# Altium PCB plp_com_u2.PcbDoc
Units mm, origin at the board's own origin, x right, y up, seen from the top; angles counter-clockwise.
Board outline 44.5 x 44.5 mm, 2 copper layers (Top Layer, Bottom Layer), stack 1.486 mm thick; 1 components, 0 nets, 6 pads, 0 vias.
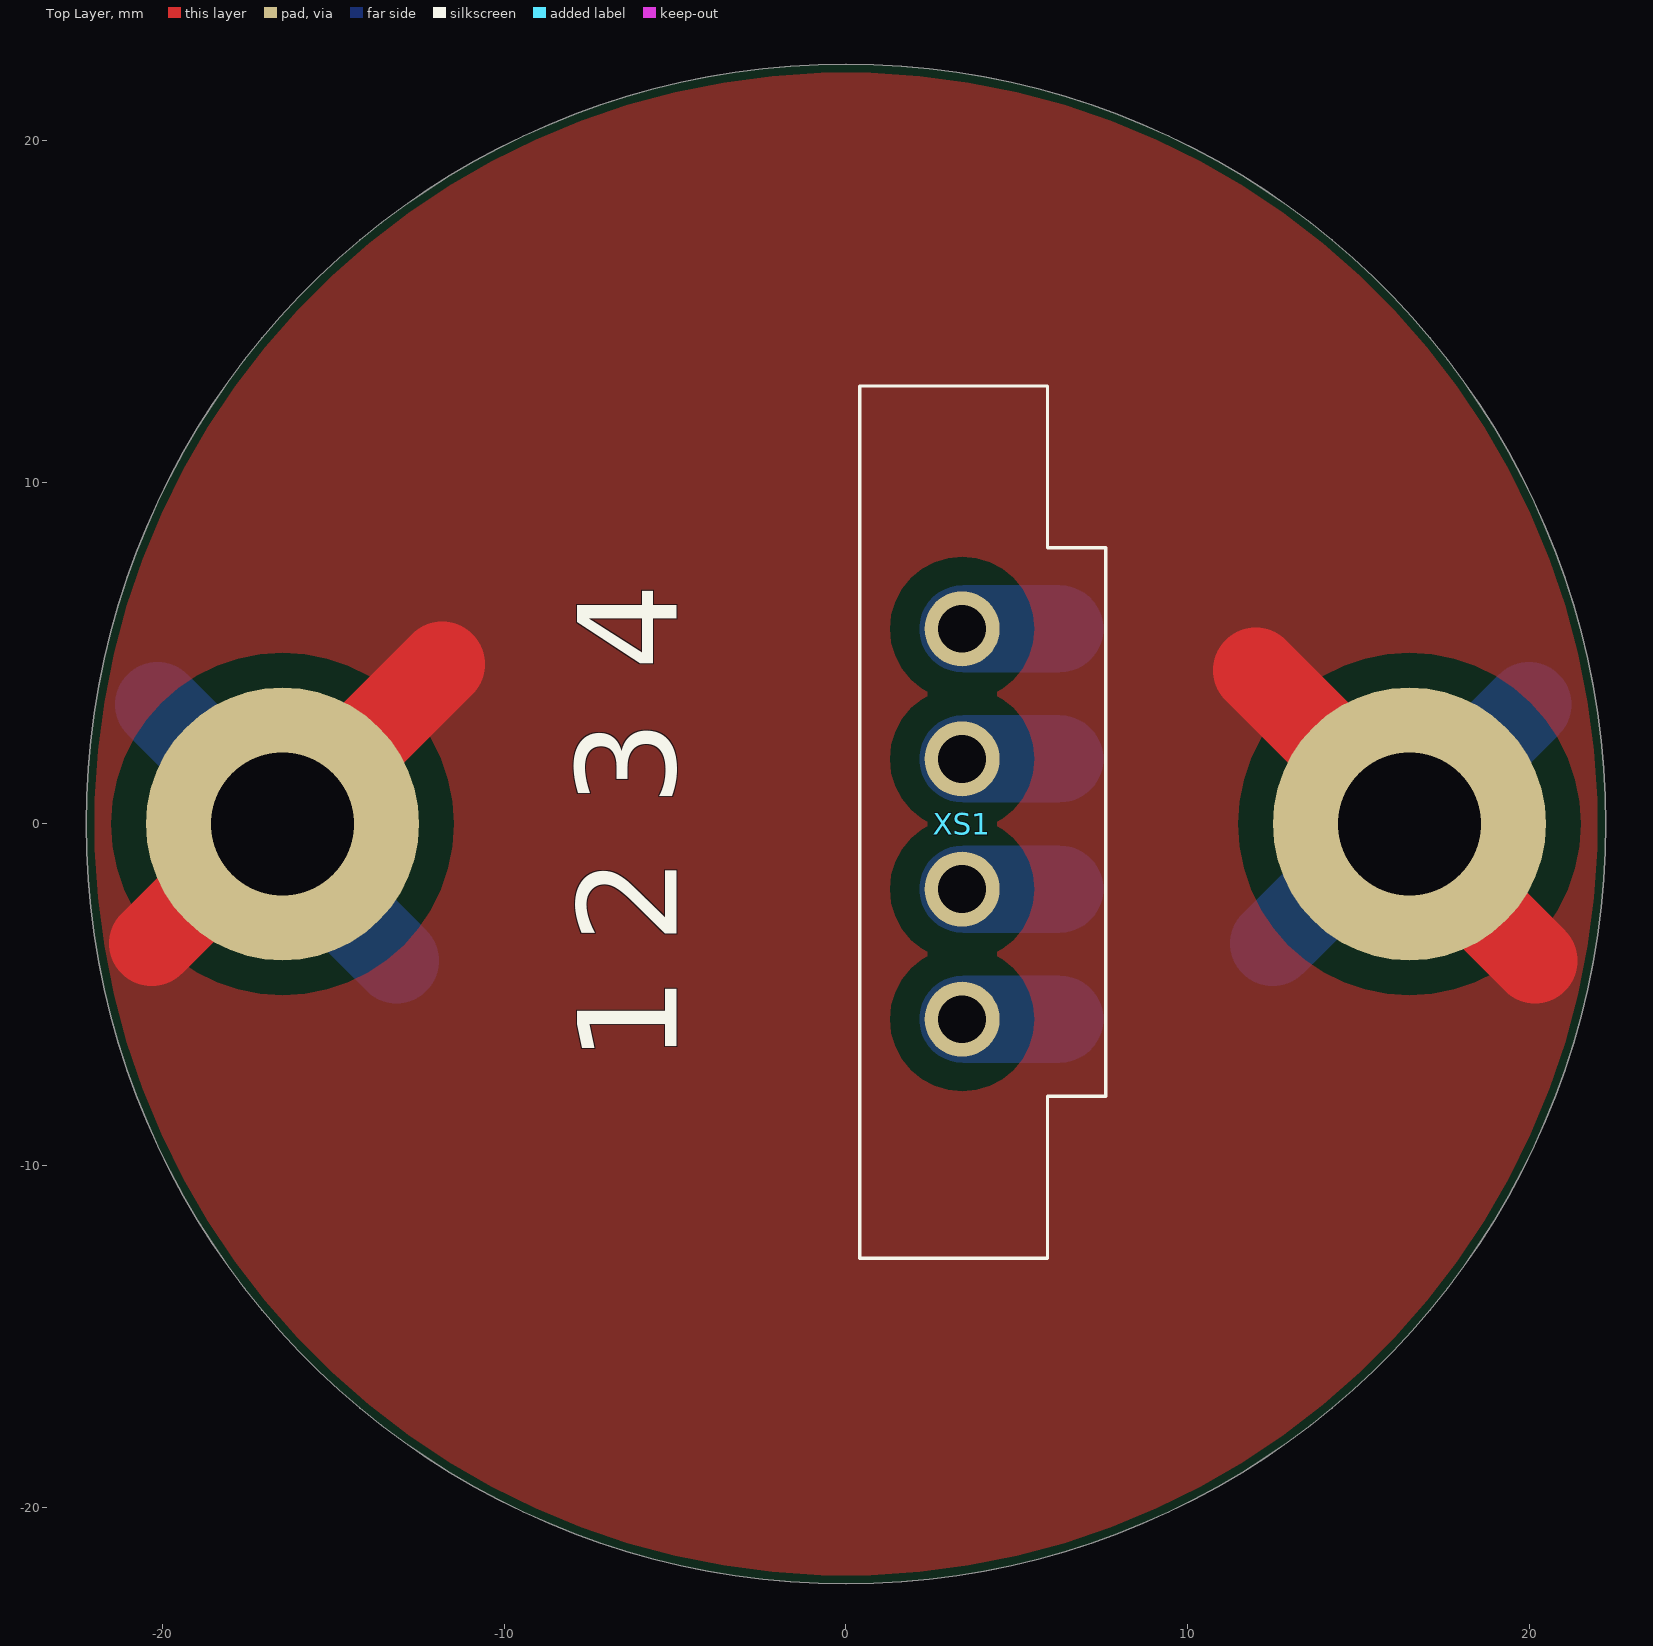
[diagram p0: Top Layer view]
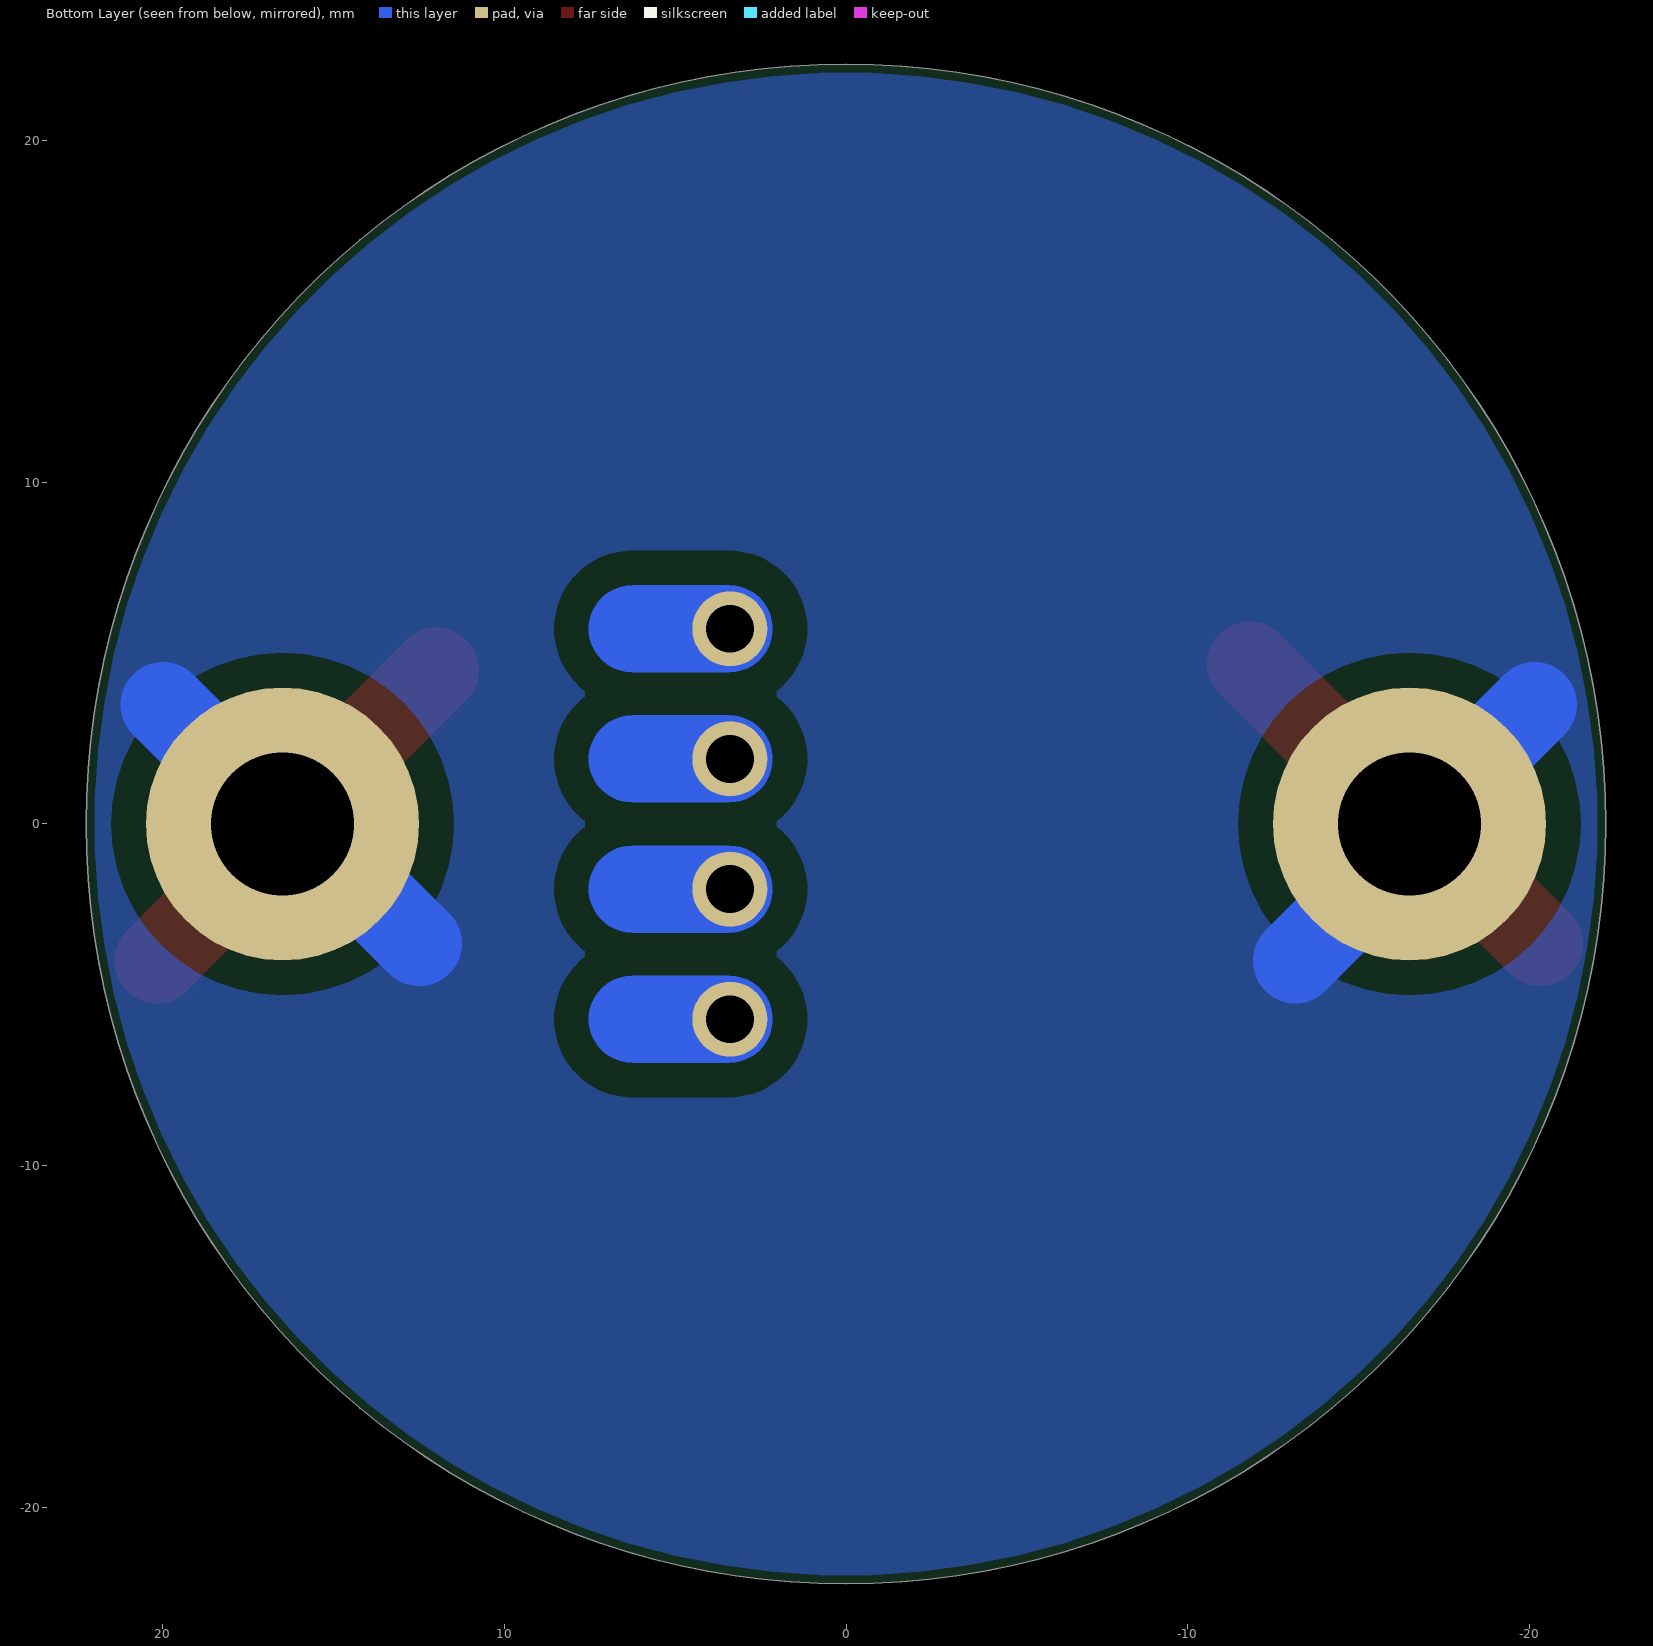
[diagram p1: Bottom Layer view, seen from below]

## Layer stack, top to bottom
Top Solder: solder mask 0.0102, Solder Resist, Dk 3.5
Top Layer: signal copper 0.018
Dielectric 2: prepreg 0.125, PP-006, Dk 4.1
Dielectric 1: dielectric 1.2, FR-4, Dk 4.8
Dielectric 3: prepreg 0.125, PP-006, Dk 4.1
Bottom Layer: signal copper 0.018
Bottom Solder: solder mask 0.0102, Solder Resist, Dk 3.5

## Board outline
-22.25,0 ccw(c0,0) 0,-22.25 ccw(c0,0) 22.25,0 ccw(c0,0) 0,22.25 ccw(c0,0)

## Design rules (kind name [scope] priority, off if disabled: settings)
BoardOutlineClearance [All] p1: gap=0.254 ignorepadtopadclearanceinfootprint=FALSE
Clearance [All] p1: gap=0.2 ignorepadtopadclearanceinfootprint=FALSE except(0: Arc-Hole Track-Hole SMDPad-Hole THPad-Hole Via-Hole Fill-Hole Poly-Hole Region-Hole Text-Hole; 1: THPad-Fill THPad-Poly THPad-Region Fill-Fill Fill-Poly Fill-Region Poly-Poly Poly-Region Region-Region)
HoleSize [All] p1: absolutevalues=TRUE maxlimit=5 minlimit=0.025 maxpercent=80.000 minpercent=20.000
PlaneClearance [All] p1: clearance=1
PolygonConnect PolygonConnect_1 [All] p1: connectstyle=Relief reliefconductorwidth=0.254 reliefentries=4 polygonreliefangle="90 Angle" airgapwidth=0.254
RoutingVias [All] p1: holewidth=0.3 width=0.7 viastyle="Through Hole" minholewidth=0.3 minwidth=0.7 maxholewidth=0.711 maxwidth=1.27
ShortCircuit [All] p1: allowed=TRUE
SilkToSilkClearance [All] p1: silktosilkclearance=0.15
SolderMaskExpansion [All] p1: expansion=0.102 istentingtop=FALSE
Width [All] p1: maxlimit=5 minlimit=0.254 preferedwidth=0.254
26 further rules are at their usual default settings.

## Components (designator, comment, footprint, x,y, rotation, side; value= is the part's Value field where it differs from the comment)
XS1 "15EDGVM-3.81-04P" "CON: 15EDGVM-3.81-04P(Long Pad)" 3.4,-5.715 r90 top

## Footprints (in the part's own frame and the unit in brackets; to place one, negate y for a bottom-side part, rotate by r counter-clockwise, add the part's x,y. Pads: shape width x height; smd on the part's side, far side on the other; paste and mask are expansions set on the pad)
"CON: 15EDGVM-3.81-04P(Long Pad)" [mm]
  round 2.2 hole 1.4: 1(0,0) 2(3.81,0) 3(7.62,0) 4(11.43,0)
  Bottom Layer region: -1.275,-2.855 -1.149,-3.408 -0.795,-3.851 -0.284,-4.097 0.284,-4.097 0.795,-3.851 1.149,-3.408 1.275,-2.855 1.275,-2.855 1.275,-0.025 1.149,0.528 0.795,0.972 0.284,1.218 -0.284,1.218 -0.795,0.972 -1.149,0.528 -1.275,-0.025 -1.275,-0.025
  Bottom Layer region: 2.535,-2.855 2.661,-3.408 3.015,-3.851 3.526,-4.097 4.094,-4.097 4.605,-3.851 4.959,-3.408 5.085,-2.855 5.085,-2.855 5.085,-0.025 4.959,0.528 4.605,0.972 4.094,1.218 3.526,1.218 3.015,0.972 2.661,0.528 2.535,-0.025 2.535,-0.025
  Bottom Layer region: 6.345,-2.855 6.471,-3.408 6.825,-3.851 7.336,-4.097 7.904,-4.097 8.415,-3.851 8.769,-3.408 8.895,-2.855 8.895,-2.855 8.895,-0.025 8.769,0.528 8.415,0.972 7.904,1.218 7.336,1.218 6.825,0.972 6.471,0.528 6.345,-0.025 6.345,-0.025
  Bottom Layer region: 10.155,-2.855 10.281,-3.408 10.635,-3.851 11.146,-4.097 11.714,-4.097 12.225,-3.851 12.579,-3.408 12.705,-2.855 12.705,-2.855 12.705,-0.025 12.579,0.528 12.225,0.972 11.714,1.218 11.146,1.218 10.635,0.972 10.281,0.528 10.155,-0.025 10.155,-0.025
  silkscreen extent -7,-4.2 18.54,3, body extent -7.1,-4.25 18.53,3, height 9.2

## Part data
XS1: ComponentLink1Description=Datasheet, ComponentLink1URL=http://files.xn--e1agecchai.xn--p1ai/pdf/15edgvm-3.81.pdf

## Free pads (board coordinates)
  round 8 hole 4.2: 0(-16.5,0) 0(16.5,0)

## Nets (pads, with @x,y where several pads share a name; then routed paths per layer and width w, separated by ;. In a path a pad name is that pad's centre, name@x,y a point inside that pad or via, vN(x,y) a via of type N, cw(c..) or ccw(c..) an arc to the next point about the centre after c; other vN are vias at no path point)
pads on no net: XS1.1 XS1.2 XS1.3 XS1.4
copper on no net: | length 43.7
  Top Layer w2.5: -20.324,-3.5 -15.824,1 ; -15.5,1 -11.824,4.676 ; 12,4.5 16.5,0 16.5,-0.324 20.176,-4
  Bottom Layer w2.5: -20.162,3.5 -16.662,0 ; -16.662,-0.5 -13.162,-4 ; 12.5,-3.5 16,0 16.5,0 20,3.5

## Polygon pours and split planes (outlines as drawn)
no net on Bottom Layer "NONET_L02_P-001" (solid, pour order 0): -23,23 23,23 23,-24 -23,-24
no net on Top Layer "NONET_L02_P-001" (solid, pour order 1): -23.177,23 22.823,23 22.823,-23.458 -23.177,-23.458

## Silkscreen, mask and mechanical layers (free items; w line width, h text height)
Top Overlay:
  text "4" at -4,4.5 h5 r90
  text "3" at -4.056,0.5 h5 r90
  text "2" at -4,-3.505 h5 r90
  text "1" at -4,-7 h5 r90
Bottom Solder:
  circle w1: c0,0 r21.75
  text "4" at -1,7 h5 r90
  text "3" at -1.056,3 h5 r90
  text "2" at -1,-0.995 h5 r90
  text "1" at -1,-5 h5 r90
Board:
  circle w0.15: c0,0 r22.25